# EAGLE board MOTOR_DRIVER (EAGLE 8.0.1)

Size 91.42 x 97.46 mm. Coordinates in mm from the lower left corner, seen from the top.
Outline: 0,0 91.42,0 91.42,45.39 0,45.39 0,0
Outline: 0,52.07 38.08,52.07 38.08,97.46 0,97.46 0,52.07
Outline: 53.34,52.07 91.42,52.07 91.42,97.46 53.34,97.46 53.34,52.07
Copper layers (1*16): Top 0.035mm / dielectric 1.5mm / Bottom 0.035mm
Design rules "default": minimum track width 10mil, minimum drill 24mil, track to track 8mil, track to pad 8mil, pad to pad 8mil, via to via 8mil, smd to smd 8mil, copper to edge 40mil, drill to drill 8mil, minimum pad ring 10mil, minimum via ring 8mil, stop-mask expansion 4mil, vias tented up to drill 0mil, thermal gap 10mil

## Footprints (pad centres in the part's own frame; a part is rotated, then mirrored left to right if it is on the bottom)
BIGSWITCH = smd 2.4 x 10: GND 4.65,0; VCC -4.65,0
KCS3 = drill 1.143 pad 1.651: 1 -5.08,0; 2 -2.54,0; 3 0,0
C025-050X050 = drill 0.813 octagon: 1 -1.27,0; 2 1.27,0
C025-024X044 = drill 0.813 octagon: 1 -1.27,0; 2 1.27,0
C050-025X075 = drill 0.813 octagon: 1 -2.54,0; 2 2.54,0
153CLV-1010 = smd 4 x 2.5: + 4,0; - -4,0
TO220ABS = drill 1.016 long: A1 -2.54,-2.54; A2 2.54,-2.54; C 0,-2.54
FUSEHOLDER3588 = smd 1.57 x 2.82: A -4.96,3.03; B 4.96,3.03; C -4.96,-3.03; D 4.96,-3.03
SE14 = drill 1.397 pad 2.54 octagon: MP 0,0
0805 = smd 0.8 x 1.2: 1 -0.9,0; 2 0.9,0
SMS-006 = smd 1.092 x 2.007: 1 -6.35,-4.496; 2 -3.81,-4.496; 3 -1.27,-4.496; 4 1.27,-4.496; 5 3.81,-4.496; 6 6.35,-4.496; 7 6.35,4.496; 8 3.81,4.496; 9 1.27,4.496; 10 -1.27,4.496; 11 -3.81,4.496; 12 -6.35,4.496
FE10 = drill 0.813 long: 1 -11.43,0; 2 -8.89,0; 3 -6.35,0; 4 -3.81,0; 5 -1.27,0; 6 1.27,0; 7 3.81,0; 8 6.35,0; 9 8.89,0; 10 11.43,0
FE10-2 = drill 0.914 octagon: 1 -11.43,1.27; 2 -11.43,-1.27; 3 -8.89,1.27; 4 -8.89,-1.27; 5 -6.35,1.27; 6 -6.35,-1.27; 7 -3.81,1.27; 8 -3.81,-1.27; 9 -1.27,1.27; 10 -1.27,-1.27; 11 1.27,1.27; 12 1.27,-1.27; 13 3.81,1.27; 14 3.81,-1.27; 15 6.35,1.27; 16 6.35,-1.27; 17 8.89,1.27; 18 8.89,-1.27; 19 11.43,1.27; 20 11.43,-1.27
SOIC-8_M = smd 1.6 x 0.533: 1 -2.654,1.905; 2 -2.654,0.635; 3 -2.654,-0.635; 4 -2.654,-1.905; 5 2.654,-1.905; 6 2.654,-0.635; 7 2.654,0.635; 8 2.654,1.905
TQFP32-08 = smd 1.27 x 0.559: 1 -4.293,2.8; 2 -4.293,2; 3 -4.293,1.2; 4 -4.293,0.4; 5 -4.293,-0.4; 6 -4.293,-1.2; 7 -4.293,-2; 8 -4.293,-2.8; 17 4.293,-2.8; 18 4.293,-2; 19 4.293,-1.2; 20 4.293,-0.4; 21 4.293,0.4; 22 4.293,1.2; 23 4.293,2; 24 4.293,2.8 | smd 0.559 x 1.27: 9 -2.8,-4.293; 10 -2,-4.293; 11 -1.2,-4.293; 12 -0.4,-4.293; 13 0.4,-4.293; 14 1.2,-4.293; 15 2,-4.293; 16 2.8,-4.293; 25 2.8,4.293; 26 2,4.293; 27 1.2,4.293; 28 0.4,4.293; 29 -0.4,4.293; 30 -1.2,4.293; 31 -2,4.293; 32 -2.8,4.293
TEENSY_3.5/3.6_BASIC = drill 0.965: 0/RX -25.4,-7.62; 1/TX -22.86,-7.62; 2 -20.32,-7.62; 3/CANTX -17.78,-7.62; 3V3 7.62,-7.62; 3V3_LO -22.86,7.62; 4/CANRX -15.24,-7.62; 5 -12.7,-7.62; 6 -10.16,-7.62; 7 -7.62,-7.62; 8 -5.08,-7.62; 9/CS -2.54,-7.62; 10/CS 0,-7.62; 11/MOSI 2.54,-7.62; 12/MISO 5.08,-7.62; 13/SCK 5.08,7.62; 14/A0 2.54,7.62; 15/A1 0,7.62; 16/A2 -2.54,7.62; 17/A3 -5.08,7.62; 18/A4/SDA -7.62,7.62; 19/A5/SCL -10.16,7.62; 20/A6 -12.7,7.62; 21/A7 -15.24,7.62; 21/DAC0 12.7,7.62; 22/A8 -17.78,7.62; 23/A9 -20.32,7.62; 24 10.16,-7.62; 25 12.7,-7.62; 26 15.24,-7.62; 27 17.78,-7.62; 28 20.32,-7.62; 29 22.86,-7.62; 30 25.4,-7.62; 31/A12 27.94,-7.62; 32/A13 30.48,-7.62; 33/A14 30.48,7.62; 34/A15 27.94,7.62; 35/A16 25.4,7.62; 36/A17 22.86,7.62; 37/A18 20.32,7.62; 38/A19 17.78,7.62; 39/A20 15.24,7.62; A10 -17.78,5.08; A11 -15.24,5.08; A22/DAC1 10.16,7.62; AGND -25.4,7.62; AREF -20.32,5.08; GND -27.94,-7.62; GND2 7.62,7.62; VIN -27.94,7.62; VUSB -25.4,5.08
T03B = drill 1.372 pad 1.88 square: 1 -5.08,-1.016 | drill 1.372 pad 1.88: 2 -2.54,-1.016; 3 0,-1.016
HC49US = drill 0.7 pad 1.651: 1 -2.54,0; 2 2.54,0

## Placement (x,y rotation side)
BIG_SWITCH  [BIGSWITCH]  -66.04,82.04 0 top  (outside the outline)
BOT_FWD  CSD18502KCS_KCS_3  [KCS3]  10.16,60.96 270 top
BOT_REVERSE  CSD18502KCS_KCS_3  [KCS3]  16.76,87.63 90 top
C1  10uF  [C025-050X050]  34.29,66.04 0 top
C2  10uF  [C025-050X050]  34.29,60.96 0 top
C3  10uF  [C025-050X050]  34.29,82.55 0 top
C4  10uF  [C025-050X050]  34.29,87.63 0 top
C5  18 pF  [C025-024X044]  52.07,21.59 0 top
C6  18 pF  [C025-024X044]  52.07,11.43 0 bottom
C8  10uF  [C050-025X075]  -32,24.89 0 top  (outside the outline)
C12  [153CLV-1010]  -68.83,38.1 0 top  (outside the outline)
C13  [153CLV-1010]  -69.34,26.16 0 top  (outside the outline)
C14  [153CLV-1010]  -68.83,12.7 0 top  (outside the outline)
C15  [153CLV-1010]  -68.83,0 0 top  (outside the outline)
D1  BYV32  [TO220ABS]  -84.07,-36.32 0 top  (outside the outline)
D2  BYV32  [TO220ABS]  -84.07,-51.56 0 top  (outside the outline)
D3  BYV32  [TO220ABS]  25.4,64.01 90 top
D4  BYV32  [TO220ABS]  25.4,85.09 90 top
FUSE  [FUSEHOLDER3588]  -62.48,60.45 180 top  (outside the outline)
LSP3  SE14  [SE14]  3.81,60.96 0 top
LSP4  SE14  [SE14]  -36.83,105.41 0 top  (outside the outline)
LSP5  SE14  [SE14]  -36.83,80.01 0 top  (outside the outline)
LSP6  SE14  [SE14]  3.81,55.88 0 top
R1  9090  [0805]  -82.04,-29.21 0 top  (outside the outline)
R2  4750  [0805]  -85.6,-29.21 0 top  (outside the outline)
R3  2.32M  [0805]  -89.15,-29.21 0 top  (outside the outline)
R4  1.15M  [0805]  -92.71,-29.21 0 top  (outside the outline)
S1  SWS006  [SMS-006]  83.82,16.51 90 top
SV1  [FE10]  21.59,40.64 0 top
SV2  [FE10]  21.59,3.81 0 top
SV3  [FE10-2]  69.85,39.37 0 top
SV4  [FE10]  69.85,3.81 0 top
SV5  [FE10]  21.59,92.71 0 top
SV6  [FE10]  21.59,55.88 0 top
TOP_FWD  CSD18502KCS_KCS_3  [KCS3]  10.67,87.63 90 top
TOP_REVERSE  CSD18502KCS_KCS_3  [KCS3]  16.51,60.96 270 top
U3  MIC4604YM  [SOIC-8_M]  17.78,74.93 270 bottom
U6  MIC4604YM  [SOIC-8_M]  30.48,74.93 270 bottom
U7  ATMEGA328P_TQFP  [TQFP32-08]  63.5,16.51 0 top
U$1  TEENSY_3.5/3.6_BASIC  [TEENSY_3.5/3.6_BASIC]  38.1,16.51 0 top
U$2  HEATSINK  [HEATSINK]  7.62,85.34 90 top
U$3  LM1086IT-5.0/NOPB  [T03B]  -32,39.12 0 top  (outside the outline)
U$4  HEATSINK  [HEATSINK]  19.05,63.5 270 top
U$5  HEATSINK  [HEATSINK]  13.21,85.34 270 top
U$6  HEATSINK  [HEATSINK]  13.72,63.75 90 top
Y1  16MHz  [HC49US]  50.8,16.51 0 bottom

## Library data of the parts
BIG_SWITCH = bigswitch
BOT_FWD BOT_REVERSE TOP_FWD TOP_REVERSE = CSD18502KCS; MANUFACTURER_PART_NUMBER: csd18502kcs_kcs_3; VENDOR: TEXAS INSTRUMENTS
C1-C6 C8 C12-C15 = resistor
D1-D4 = diode
FUSE = minifuse
LSP3-LSP6 = solpad
R1-R4 = SparkFun-Resistors; PROD_ID: RES-11622
S1 = smd-special
SV1-SV6 = con-lsta; OC_FARNELL: unknown; OC_NEWARK: unknown
U3 U6 = MIC4604; MANUFACTURER_PART_NUMBER: mic4604ym; VENDOR: Microchip
U7 = SparkFun-IC-Microcontroller; PROD_ID: IC-09069
U$1 = Teensy356
U$2 U$4-U$6 = heatsink
U$3 = TI1086; COPYRIGHT: Copyright C 2015 Accelerated Designs. All rights reserved; MANUFACTURER_PART_NUMBER: LM1086IT50; VENDOR: National Semiconductor
Y1 = SparkFun-Clocks; PROD_ID: XTAL-08181; SF_ID: COM-00536

## Nets
3_3V: SV3.9 U$1.3V3_LO
5V: C8.1 S1.7 SV1.8 SV3.6 SV3.7 SV3.18 U$3.2
5V_TEENSY: S1.6 U7.4 U7.6 U7.18 U7.29 U$1.VIN
7_4V: SV1.1 U$3.3
7_4V_TOP: BIG_SWITCH.GND D3.A1 D3.A2 D4.A1 D4.A2 SV5.1 TOP_FWD.2 TOP_REVERSE.2 U3.1 U6.1
BATT_VOLTAGE: FUSE.A FUSE.C LSP4.MP R1.2
BATT_VOLTAGE_SENSE: R1.1 R2.2 U$1.14/A0
BLT_RX: SV3.1 U$1.7
BLT_TX: SV3.3 U$1.8
CAMERA_A0: SV3.17 U7.23
CAMERA_CLK: SV3.13 U7.12
CAMERA_SI: SV3.15 U7.11
EMF_SENSE_HIGH: D1.C U$1.17/A3
EMF_SENSE_LOW: D2.C U$1.16/A2
GND: C5.2 C6.2 C8.2 R2.1 S1.8 S1.9 S1.10 S1.11 S1.12 SV1.10 SV3.2 SV3.5 SV3.11 SV3.12 SV3.14 U7.3 U7.5 U7.21 U$1.AGND U$1.GND U$1.GND2 U$3.1
GND_TOP: BOT_FWD.3 BOT_REVERSE.3 C12.- C13.- C14.- C15.- LSP5.MP SV5.10 U3.7 U6.7
HALL: SV3.16 U7.32
HI1: SV2.1 U$1.3/CANTX
HI1_TOP: SV6.1 U3.5
HI2: SV2.3 U$1.5
HI2_TOP: SV6.3 U6.6
LI1: SV2.2 U$1.4/CANRX
LI1_TOP: SV6.2 U3.6
LI2: SV2.4 U$1.6
LI2_TOP: SV6.4 U6.5
M1_GPIO1: U7.27
M1_GPIO2: U7.28
M1_GPIO3: U7.13
M1_GPIO4: U7.1
MOTOR_HIGH: R3.2 SV2.5
MOTOR_HIGH_TOP: BOT_REVERSE.2 LSP3.MP TOP_FWD.3
MOTOR_LOW: D2.A1 D2.A2 R4.1 SV2.6
MOTOR_LOW_TOP: BOT_FWD.2 LSP6.MP SV6.5 SV6.6 TOP_REVERSE.3
N$1: D1.A1 D1.A2 R3.1 R4.2
N$2: BOT_REVERSE.1 U3.8
N$3: TOP_FWD.1 U3.3
N$4: C1.1 C2.1 U3.4
N$5: C1.2 C2.2 D3.C U3.2
N$6: C6.1 U7.7 Y1.1
N$7: C5.1 U7.8 Y1.2
N$9: BOT_FWD.1 U6.8
N$10: TOP_REVERSE.1 U6.3
N$11: C3.1 C4.1 U6.4
N$12: C3.2 C4.2 D4.C U6.2
N$13: U7.14 U$1.10/CS
N$15: U7.15 U$1.12/MISO
N$16: U7.17 U$1.13/SCK
N$18: U7.16 U$1.11/MOSI
N$20: SV3.4
N$21: BIG_SWITCH.VCC C12.+ C13.+ C14.+ C15.+ FUSE.B FUSE.D
N$33: SV4.10
N$34: SV4.9
N$35: SV4.8
N$36: SV4.7
N$37: SV4.6
N$38: SV4.5
N$39: SV4.4
N$40: SV4.3
N$41: SV4.2
N$42: SV4.1
REC_MOTOR: SV3.8 U$1.15/A1
REC_SERVO: SV3.10 U$1.18/A4/SDA
RX: SV3.20 U7.30
SERVO: SV1.9 U$1.20/A6
SW1: S1.1 U$1.24
SW2: S1.2 U$1.25
SW3: S1.3 U$1.26
SW4: S1.4 U$1.27
SW5: S1.5 U$1.28
TX: SV3.19 U7.31

## Tracks (layer width: path | path; a pad name or v marks a point on that pad's centre or on a via)
3_3V  (1 unrouted)
5V  (6 unrouted)
5V_TEENSY  (5 unrouted)
7_4V  (1 unrouted)
7_4V_TOP  (9 unrouted)
BATT_VOLTAGE  (3 unrouted)
BATT_VOLTAGE_SENSE  (2 unrouted)
BLT_RX  (1 unrouted)
BLT_TX  (1 unrouted)
CAMERA_A0  (1 unrouted)
CAMERA_CLK  (1 unrouted)
CAMERA_SI  (1 unrouted)
EMF_SENSE_HIGH  (1 unrouted)
EMF_SENSE_LOW  (1 unrouted)
GND  (21 unrouted)
GND_TOP  (9 unrouted)
HALL  (1 unrouted)
HI1  (1 unrouted)
HI1_TOP  (1 unrouted)
HI2  (1 unrouted)
HI2_TOP  (1 unrouted)
LI1  (1 unrouted)
LI1_TOP  (1 unrouted)
LI2  (1 unrouted)
LI2_TOP  (1 unrouted)
MOTOR_HIGH  (1 unrouted)
MOTOR_HIGH_TOP  (2 unrouted)
MOTOR_LOW  (3 unrouted)
MOTOR_LOW_TOP  (4 unrouted)
N$1  (3 unrouted)
N$2  (1 unrouted)
N$3  (1 unrouted)
N$4  (2 unrouted)
N$5  (3 unrouted)
N$6  (2 unrouted)
N$7  (2 unrouted)
N$9  (1 unrouted)
N$10  (1 unrouted)
N$11  (2 unrouted)
N$12  (3 unrouted)
N$13  (1 unrouted)
N$15  (1 unrouted)
N$16  (1 unrouted)
N$18  (1 unrouted)
N$21  (6 unrouted)
REC_MOTOR  (1 unrouted)
REC_SERVO  (1 unrouted)
RX  (1 unrouted)
SERVO  (1 unrouted)
SW1  (1 unrouted)
SW2  (1 unrouted)
SW3  (1 unrouted)
SW4  (1 unrouted)
SW5  (1 unrouted)
TX  (1 unrouted)